# EAGLE board Fantastic Jarv (EAGLE 9.7.0)

Size 203.35 x 207.95 mm. Coordinates in mm from the lower left corner, seen from the top.
Outline: 0,0 203.35,0 203.35,207.95 0,207.95 0,0
Copper layers (1*16): Top 0.035mm / dielectric 1.5mm / Bottom 0.035mm
Design rules "default": minimum track width 6mil, minimum drill 0.35mm, track to track 6mil, track to pad 6mil, pad to pad 6mil, via to via 6mil, smd to smd 6mil, copper to edge 40mil, drill to drill 6mil, minimum pad ring 10mil, minimum via ring 8mil, stop-mask expansion 4mil, vias tented up to drill 0mil, thermal gap 10mil

## Footprints (pad centres in the part's own frame; a part is rotated, then mirrored left to right if it is on the bottom)
LEDRD254W60D565H860B = drill 0.981 pad 1.581: 1 -1.27,0; 2 1.27,0
DIODE-AXIAL = drill 1: 1 -5.08,0; 2 5.08,0
MOTOR = drill 1.118 pad 3.15 octagon: + 2.54,0; - -2.54,0
RESAD1016W63L850D250B = drill 0.83 pad 1.43: 1 -5.08,0; 2 5.08,0
HA-06-SM065 = drill 1 pad 1.676: 1 -2.54,-2.54; 2 0,2.54; 3 2.54,-2.54
ARDUINO-UNO-R3-SHIELD = drill 1.016 pad 1.88: 3.3V 24.13,-2.54; 5V 24.13,0; A0 24.13,12.7; A1 24.13,15.24; A2 24.13,17.78; A3 24.13,20.32; A4 24.13,22.86; A5 24.13,25.4; AREF -24.13,-13.97; D2 -24.13,20.32; D3 -24.13,17.78; D4 -24.13,15.24; D5 -24.13,12.7; D6 -24.13,10.16; D7 -24.13,7.62; D8 -24.13,3.81; D9 -24.13,1.27; D10 -24.13,-1.27; D11 -24.13,-3.81; D12 -24.13,-6.35; D13 -24.13,-8.89; GND@0 24.13,2.54; GND@1 24.13,5.08; GND@2 -24.13,-11.43; IOREF 24.13,-7.62; NC 24.13,-10.16; RES 24.13,-5.08; RX -24.13,25.4; SCL -24.13,-19.05; SDA -24.13,-16.51; TX -24.13,22.86; VIN 24.13,7.62
TO92 = drill 0.813 octagon: 1 -1.27,0; 2 0,1.905; 3 1.27,0
JHD-162A = drill 1.016 long: 1 -19.05,0; 2 -16.51,0; 3 -13.97,0; 4 -11.43,0; 5 -8.89,0; 6 -6.35,0; 7 -3.81,0; 8 -1.27,0; 9 1.27,0; 10 3.81,0; 11 6.35,0; 12 8.89,0; 13 11.43,0; 14 13.97,0; 15 16.51,0; 16 19.05,0

## Placement (x,y rotation side)
D1  RED  [LEDRD254W60D565H860B]  185.87,75.96 180 top
D2  DIODEDIODE-AXIAL  [DIODE-AXIAL]  10.99,129.54 270 top
M1  MOTOR_HDR  [MOTOR]  8.26,138.62 0 top
R1  220  [RESAD1016W63L850D250B]  166.82,103.9 90 top
R2  1k  [RESAD1016W63L850D250B]  187.14,88.66 90 top
R3  1k  [RESAD1016W63L850D250B]  142.76,198.98 90 top
RPOT1  250k  [HA-06-SM065]  126.18,78.5 0 top
U1  ARDUINO-UNO-R3-SHIELD  [ARDUINO-UNO-R3-SHIELD]  63.44,88.26 270 top
U3  TMP36GT9Z_TO92  [TO92]  179.52,101.36 0 top
U4  LCD-16X2JHD-162A  [JHD-162A]  147.73,36.63 0 top

## Library data of the parts
D1 = Tinkercad; CATEGORY: Opto-Electronic; SUB-CATEGORY: LED; VALUE: LED_RED
D2 M1 R1-R3 RPOT1 U1 U3 U4 = Tinkercad

## Nets
D1_A: D1.1 R2.1
M1_+: D2.1 M1.+
U1_5V: R1.2 RPOT1.1 U1.5V U3.3 U4.2
U1_A0: U1.A0 U3.2
U1_D2: U1.D2 U4.14
U1_D3: U1.D3 U4.13
U1_D4: U1.D4 U4.12
U1_D5: U1.D5 U4.11
U1_D10: D2.2 U1.D10
U1_D11: U1.D11 U4.6
U1_D12: U1.D12 U4.4
U1_D13: R2.2 U1.D13
U1_GND: D1.2 M1.- RPOT1.3 U1.GND@0 U1.GND@1 U1.GND@2 U3.1 U4.1 U4.5 U4.16
U4_LED+: R1.1 U4.15
U4_VO: RPOT1.2 U4.3

## Tracks (layer width: path | path; a pad name or v marks a point on that pad's centre or on a via)
D1_A  (1 unrouted)
M1_+  (1 unrouted)
U1_5V  (4 unrouted)
U1_A0  (1 unrouted)
U1_D2  (1 unrouted)
U1_D3  (1 unrouted)
U1_D4  (1 unrouted)
U1_D5  (1 unrouted)
U1_D10  (1 unrouted)
U1_D11  (1 unrouted)
U1_D12  (1 unrouted)
U1_D13  (1 unrouted)
U1_GND  (9 unrouted)
U4_LED+  (1 unrouted)
U4_VO  (1 unrouted)